# Altium PCB new.PcbDoc
Units mil, origin at the board's own origin, x right, y up, seen from the top; angles counter-clockwise.
Board outline 5529.7 x 2001.01 mil, 2 copper layers (Top Layer, Bottom Layer); 128 components, 106 nets, 434 pads, 0 vias.
Unrouted connection lines stored in the file: 307.
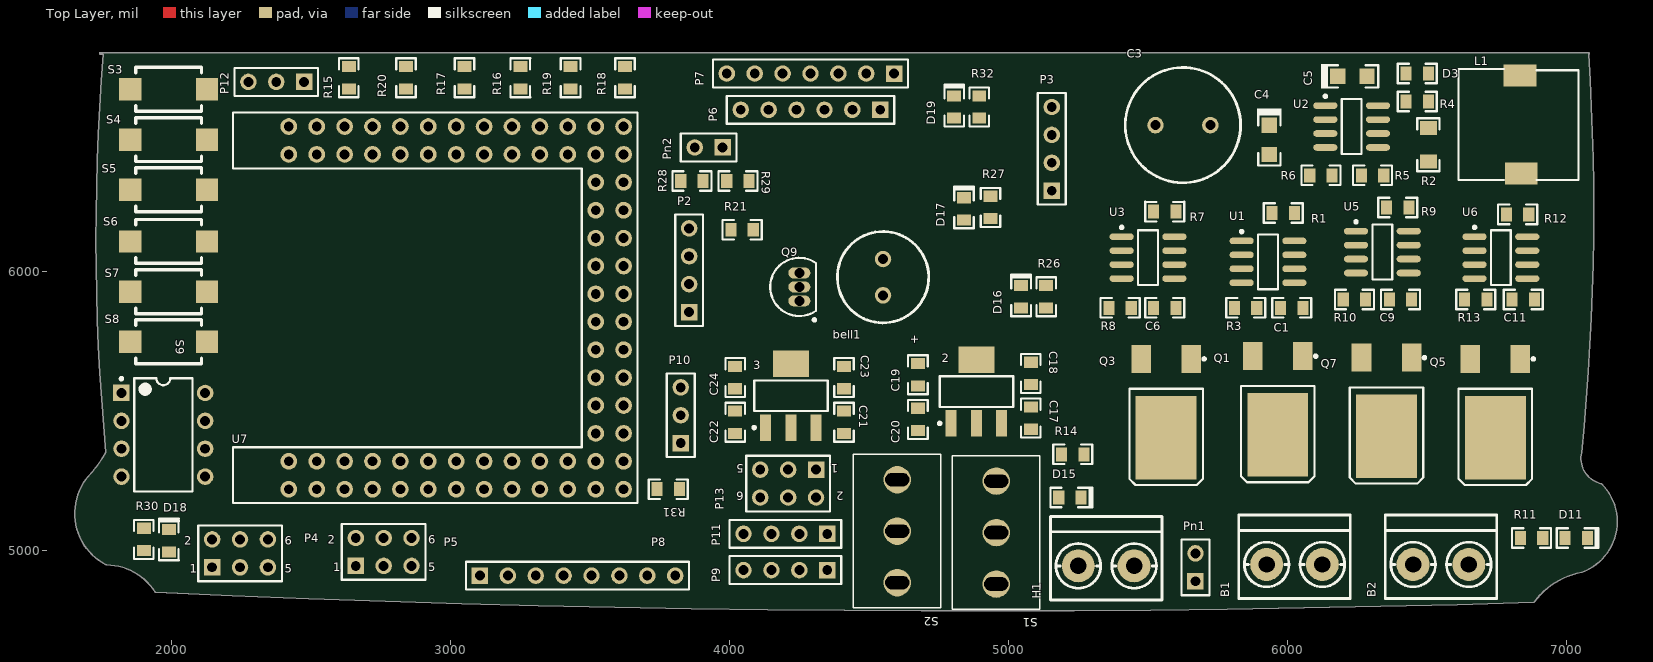
[diagram p0: Top Layer view]
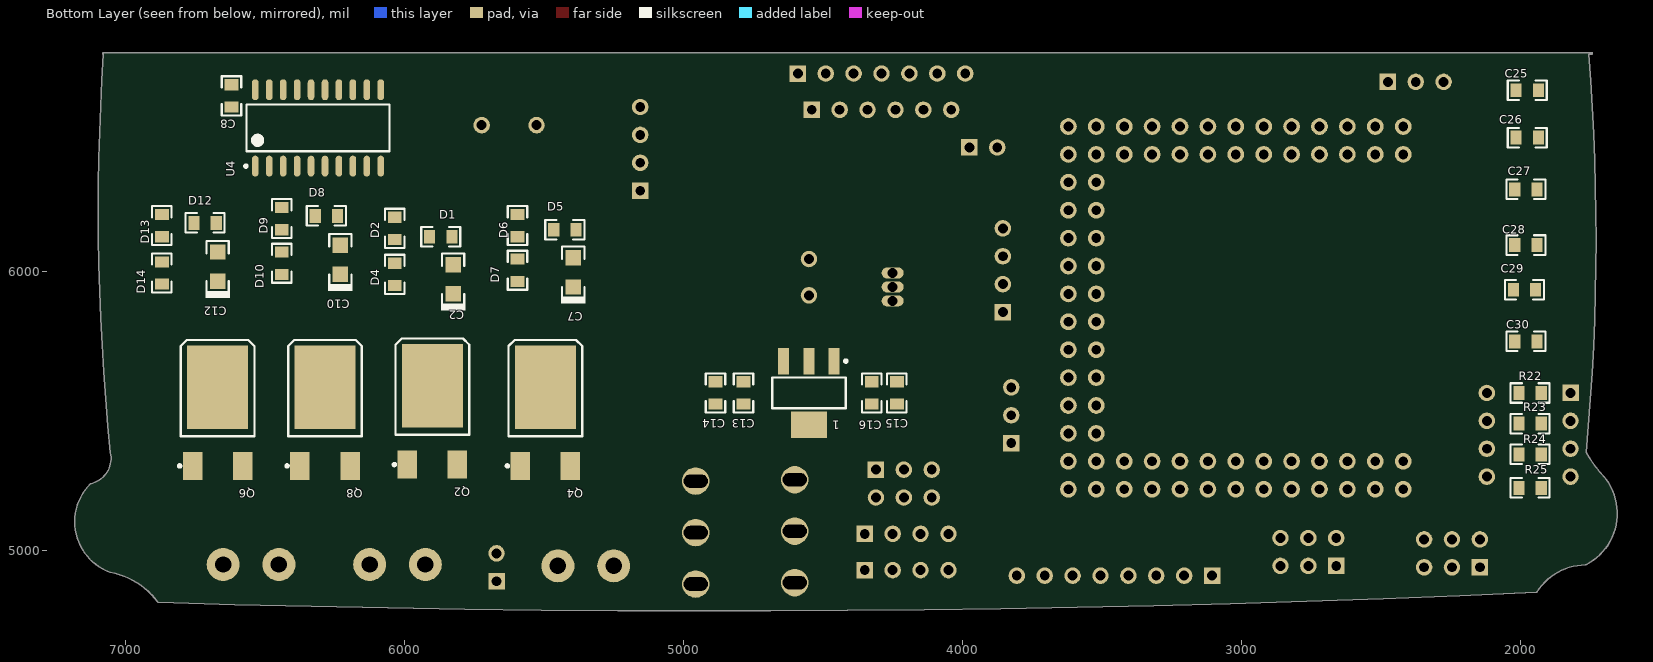
[diagram p1: Bottom Layer view, seen from below]

## Layer stack, top to bottom
Top Layer: signal copper 1.4
Dielectric: dielectric 12.6, FR-4, Dk 4.8
Bottom Layer: signal copper 1.4

## Board outline
1940.05,4851.98 ccw(c1763.61,4739.71) 1766.48,4948.82 ccw(c1763.61,4739.71) 1766.46,4948.82 1766.48,4948.82 cw(c1766.49,4951.34) 1765.36,4949.09 cw(c1857.94,5132.66) 1701.98,5266.61 cw(c1703.89,5264.97) 1702.05,5266.69 ccw(c1354.87,5583.62) 1763.92,5351.97 cw(c10055.25,6117.88) 1754.95,6779.6 1743.9,6779.6 cw(c1743.9,6782.11) 1743.9,6784.63 7079.01,6784.63 cw(c7079.01,6782.11) 7081.52,6782.11 cw(c7079.01,6782.11) 7079.64,6779.68 cw(c-1623.14,6220.55) 7097.58,6220.55 cw(c-1623.14,6220.55) 7054.14,5351.17 cw(c7051.63,5351.42) 7054.08,5350.85 ccw(c7144.82,5330.7) 7124.63,5239.97 ccw(c7144.82,5330.7) 7124.65,5239.97 7124.63,5239.97 cw(c7124.11,5237.51) 7125.89,5239.29 cw(c6989.57,5103.27) 7182.14,5103.27 cw(c6989.57,5103.27) 7055.42,4922.3 cw(c7054.56,4924.67) 7055.01,4922.19 ccw(c7103.51,4655.1) 6884.42,4815.39 ccw(c7103.51,4655.1) 6884.41,4815.37 6884.42,4815.39 cw(c6882.38,4816.86) 6882.46,4814.34 cw(c4888.74,69406.09) 1942.07,4850.8 cw(c1942.19,4853.31)

## Design rules (kind name [scope] priority, off if disabled: settings)
Clearance [All] p1: gap=10
PolygonConnect [All] p1: connectstyle=Relief reliefconductorwidth=10 reliefentries=4 polygonreliefangle="90 Angle" airgapwidth=10
RoutingVias [All] p1: holewidth=28 width=50 viastyle="Through Hole" minholewidth=28 minwidth=50 maxholewidth=28 maxwidth=50
SolderMaskExpansion [All] p1: expansion=4
Width [All] p1: maxlimit=10 minlimit=10 preferedwidth=10
28 further rules are at their usual default settings.

## Classes and differential pairs
component class "mos motor": B1 B2 C1 C2 C3 C4 C5 C6 C7 C8 C9 C10 C11 C12 D1 D2 D3 D4 D5 D6 D7 D8 D9 D10 D11 D12 D13 D14 L1 Q1 Q2 Q3 Q4 Q5 Q6 Q7 Q8 R1 R2 R3 R4 R5 R6 R7 R8 R9 R10 R11 R12 R13 U1 U2 U3 U4 U5 U6
component class 新主控板: 1 2 3 bell1 C13 C14 C15 C16 C17 C18 C19 C20 C21 C22 C23 C24 C25 C26 C27 C28 C29 C30 D15 D16 D17 D18 D19 H1 P2 P3 P4 P5 P6 P7 P8 P9 P10 P11 P12 P13 Pn1 Pn2 Q9 R14 R15 R16 R17 R18 R19 R20 R21 R22 R23 R24 R25 R26 R27 R28 R29 R30 R31 R32 S1 S2 S3 S4 S5 S6 S7 S8 S9 U7

## Components (designator, comment, footprint, x,y, rotation, side; value= is the part's Value field where it differs from the comment)
1 "LT1117-3.3" 1117 4550,5565 r270 bottom
2 "LT1117-5.0" 1117 4885,5570 r90 top
3 "LT1117-5" 1117 4220,5555 r90 top
B1 "Motor" KF301-2P 6025,4950 r90 top
B2 "Motor" KF301-2P 6550,4950 r90 top
bell1 "Bell" 470uF 4550,5875 r90 top
C1 "Cap" 0805(2012) 6015,5870 r0 top
C2 "Cap Pol1" SOD-323(0805) 5825.51,5970 r270 bottom
C3 "Cap Pol1" RB5-10.5 5625,6525 r0 top
C4 "Cap Pol1" SOD-323(0805) 5935,6475 r90 top
C5 "Cap Pol1" SOD-323(0805) 6230,6700 r180 top
C6 "Cap" 0805(2012) 5560,5870 r0 top
C7 "Cap Pol1" SOD-323(0805) 5395,5995 r270 bottom
C8 "Cap" 0805(2012) 6620,6630 r270 bottom
C9 "Cap" 0805(2012) 6405,5900 r180 top
C10 "Cap Pol1" SOD-323(0805) 6230,6040 r270 bottom
C11 "Cap" 0805(2012) 6845,5900 r180 top
C12 "Cap Pol1" SOD-323(0805) 6670,6015 r270 bottom
C13 "Cap Pol1" 0805(2012) 4785,5565 r270 bottom
C14 "Cap Pol1" 0805(2012) 4885,5565 r270 bottom
C15 "Cap" 0805(2012) 4235,5565 r90 bottom
C16 "Cap" 0805(2012) 4325,5565 r90 bottom
C17 "Cap" 0805(2012) 5080,5475 r270 top
C18 "Cap" 0805(2012) 5080,5635 r90 top
C19 "Cap" 0805(2012) 4675,5630 r90 top
C20 "Cap" 0805(2012) 4675,5470 r270 top
C21 "Cap Pol1" 0805(2012) 4410,5460 r90 top
C22 "Cap Pol1" 0805(2012) 4020,5460 r90 top
C23 "Cap" 0805(2012) 4410,5620 r90 top
C24 "Cap" 0805(2012) 4020,5620 r90 top
C25 "Cap" 0805(2012) 1975,6650 r0 bottom
C26 "Cap" 0805(2012) 1975,6480 r0 bottom
C27 "Cap" 0805(2012) 1980,6295 r0 bottom
C28 "Cap" 0805(2012) 1980,6095 r0 bottom
C29 "Cap" 0805(2012) 1985,5935 r0 bottom
C30 "Cap" 0805(2012) 1980,5750 r0 bottom
D1 "1N5819" 0805(2012) 5870,6125 r180 bottom
D2 "1N5819" 0805(2012) 6035,6155 r270 bottom
D3 "1N5819" 0805(2012) 6465,6710 r180 top
D4 "1N5819" 0805(2012) 6035,5990 r270 bottom
D5 "1N5819" 0805(2012) 5425,6150 r180 bottom
D6 "1N5819" 0805(2012) 5595,6165 r270 bottom
D7 "1N5819" 0805(2012) 5595,6005 r270 bottom
D8 "1N5819" 0805(2012) 6280,6200 r180 bottom
D9 "1N5819" 0805(2012) 6440,6190 r270 bottom
D10 "1N5819" 0805(2012) 6440,6030 r270 bottom
D11 "RED" 0805LED 7035,5045 r0 top
D12 "1N5819" 0805(2012) 6715,6175 r180 bottom
D13 "1N5819" 0805(2012) 6870,6165 r270 bottom
D14 "1N5819" 0805(2012) 6870,5995 r270 bottom
D15 "RED" 0805LED 5220,5190 r0 top
D16 "LED0" 0805LED 5045,5910 r90 top
D17 "LED0" 0805LED 4840,6225 r90 top
D18 "LED0" 0805LED 1990,5035 r90 top
D19 "LED0" 0805LED 4805,6590 r90 top
H1 "H1" KF301-2P 5350,4945 r90 top
L1 "Inductor" 电感10*12 6830,6525 r90 top
P2 "blueteeth" HDR1X4 3855,5855 r90 top
P3 "blueteeth" HDR1X4 5155,6290 r90 top
P4 "encode_2" HDR2X3 2145,4940 r0 top
P5 "encode_1" HDR2X3 2660,4945 r0 top
P6 "Header 6" HDR1X6 4540,6580 r180 top
P7 "遥控" HDR1X7 4590,6710 r180 top
P8 "Header 8" HDR1X8 3105,4910 r0 top
P9 "Header 4" HDR1X4 4350,4930 r180 top
P10 "Header 3" HDR1X3 3825,5385 r90 top
P11 "Header 4" HDR1X4 4350,5060 r180 top
P12 "Header 3" HDR1X3 2475,6680 r180 top
P13 "Header 3X2" HDR2X3 4310,5290 r180 top
Pn1 "Header 2" HDR1X2 5670,4890 r90 top
Pn2 "Header 2" HDR1X2 3975,6445 r180 top
Q1 "IR7843" LR7843 5965,5555 r90 top
Q2 "IR7843" LR7843 5900,5450 r270 bottom
Q3 "IR7843" LR7843 5565,5545 r90 top
Q4 "IR7843" LR7843 5495,5445 r270 bottom
Q5 "IR7843" LR7843 6745,5545 r90 top
Q6 "IR7843" LR7843 6670,5445 r270 bottom
Q7 "IR7843" LR7843 6355,5550 r90 top
Q8 "IR7843" LR7843 6285,5445 r270 bottom
Q9 "NPN9013" TO-226-AE 4250,5945 r0 top
R1 "Res2" 0805(2012) 5985,6210 r180 top
R2 "Res2" 1206(3216) 6505,6455 r270 top
R3 "Res2" 0805(2012) 5850,5870 r0 top
R4 "Res2" 0805(2012) 6465,6610 r0 top
R5 "Res2" 0805(2012) 6305,6345 r180 top
R6 "Res2" 0805(2012) 6120,6345 r0 top
R7 "Res2" 0805(2012) 5560,6215 r180 top
R8 "Res2" 0805(2012) 5400,5870 r180 top
R9 "Res2" 0805(2012) 6395,6230 r180 top
R10 "Res2" 0805(2012) 6240,5900 r180 top
R11 "Res2" 0805(2012) 6875,5045 r0 top
R12 "Res2" 0805(2012) 6825,6205 r180 top
R13 "Res2" 0805(2012) 6675,5900 r180 top
R14 "Res2" 0805(2012) 5230,5345 r0 top
R15 "Res2" 0805(2012) 2635,6695 r90 top
R16 "Res2" 0805(2012) 3250,6695 r90 top
R17 "Res2" 0805(2012) 3050,6695 r90 top
R18 "Res2" 0805(2012) 3625,6695 r90 top
R19 "Res2" 0805(2012) 3430,6695 r90 top
R20 "Res2" 0805(2012) 2840,6695 r90 top
R21 "Res2" 0805(2012) 4045,6150 r0 top
R22 "Res2" 0805(2012) 1965,5565 r180 bottom
R23 "Res2" 0805(2012) 1965,5455 r180 bottom
R24 "Res2" 0805(2012) 1965,5345 r180 bottom
R25 "Res2" 0805(2012) 1965,5225 r180 bottom
R26 "Res2" 0805(2012) 5135,5910 r90 top
R27 "Res2" 0805(2012) 4935,6230 r90 top
R28 "Res2" 0805(2012) 3865,6325 r0 top
R29 "Res2" 0805(2012) 4030,6325 r0 top
R30 "Res2" 0805(2012) 1900,5040 r90 top
R31 "Res2" 0805(2012) 3780,5220 r180 top
R32 "Res2" 0805(2012) 4895,6590 r90 top
S1 "SW-SPST" SWICH_3 4955,5065 r180 top
S2 "SW-SPST" SWICH_3 4600,5070 r180 top
S3 "SW-PB" PCBComponent_1 1985,6665 r180 top
S4 "SW-PB" PCBComponent_1 1985,6485 r180 top
S5 "SW-PB" PCBComponent_1 1985,6305 r180 top
S6 "SW-PB" PCBComponent_1 1985,6120 r180 top
S7 "SW-PB" PCBComponent_1 1985,5940 r180 top
S8 "SW-PB" PCBComponent_1 1985,5760 r180 top
S9 "SW-DIP4" DIP-8 1970,5415 r0 top
U1 "IR2104  S" IR2104S 5930,6035 r0 top
U2 "MC34063" MC34063 6230,6520 r0 top
U3 "IR2104  S" IR2104S 5500,6050 r0 top
U4 "74ls244" 74ls244Da 6310,6515 r90 bottom
U5 "IR2104  S" IR2104S 6340,6070 r0 top
U6 "IR2104  S" IR2104S 6765,6050 r0 top
U7 "KEA128" KEA128_BOARD 3020,5870 r90 top

## Footprints (in the part's own frame and the unit in brackets; to place one, negate y for a bottom-side part, rotate by r counter-clockwise, add the part's x,y. Pads: shape width x height; smd on the part's side, far side on the other; paste and mask are expansions set on the pad)
74ls244Da [mm] "SOP, 20-Leads, Body 12.80x5.50mm, Pitch 1.27mm, IPC Medium Density"
  oval 1.9x0.6 smd: 1(-3.475,5.715) 2(-3.475,4.445) 3(-3.475,3.175) 4(-3.475,1.905) 5(-3.475,0.635) 6(-3.475,-0.635) 7(-3.475,-1.905) 8(-3.475,-3.175) 9(-3.475,-4.445) 10(-3.475,-5.715) 11(3.475,-5.715) 12(3.475,-4.445) 13(3.475,-3.175) 14(3.475,-1.905) 15(3.475,-0.635) 16(3.475,0.635) 17(3.475,1.905) 18(3.475,3.175) 19(3.475,4.445) 20(3.475,5.715)
  silkscreen extent -3.6,-6.5 2.13,6.69, body extent -2.8,-6.5 2.8,6.5, height 2.2
470uF [mm]
  round 1.5 hole 0.9: 1(1.016,0) 2(4.318,0)
  silkscreen extent -1.49,-4.16 6.83,4.16
0805(2012) [mil]
  rect 40x50 smd: 1(-40,0) 2(40,0)
  silkscreen extent -70,-35 70,35
0805LED [mil]
  rect 40x50 smd: 1(-40,0) 2(40,0)
  silkscreen extent -70,-35 80,35
1117 [mm] "SOT223, 4-Leads, Body 6.50x7.00mm (avg), Pitch 2.30mm, IPC Medium Density"
  rect 2.4x1 smd: 1(-2.9,2.3) 2(-2.9,0) 3(-2.9,-2.3)
  rect 2.4x3.3 smd: 4(2.9,0)
  silkscreen extent -3.02,-3.35 1.4,3.47, body extent -1.86,-3.35 1.86,3.35, height 1.8
1206(3216) [mil]
  rect 50x60 smd: 1(-60,0) 2(60,0)
  silkscreen extent -95,-40 95,40
DIP-8 [mm] "DIP; 8 Leads; Row Spacing 7.62 mm; Pitch 2.54 mm"
  rect 1.5x1.5 hole 0.9: 1(-3.81,3.81)
  round 1.5 hole 0.9: 2(-3.81,1.27) 3(-3.81,-1.27) 4(-3.81,-3.81) 5(3.81,-3.81) 6(3.81,-1.27) 7(3.81,1.27) 8(3.81,3.81)
  silkscreen extent -3.93,-5.15 2.65,5.23, body extent -3.6,-5.15 3.6,5.15, height 5.08
HDR1X2 [mm] "Connector; Header; 2 Position"
  rect 1.5x1.5 hole 0.9: 1(0,0)
  round 1.5 hole 0.9: 2(2.54,0)
  silkscreen extent -1.27,-1.27 3.81,1.27
HDR1X3 [mm] "Connector; Header; 3 Position"
  rect 1.5x1.5 hole 0.9: 1(0,0)
  round 1.5 hole 0.9: 2(2.54,0) 3(5.08,0)
  silkscreen extent -1.27,-1.27 6.35,1.27
HDR1X4 [mm] "Connector; Header; 4 Position"
  rect 1.5x1.5 hole 0.9: 1(0,0)
  round 1.5 hole 0.9: 2(2.54,0) 3(5.08,0) 4(7.62,0)
  silkscreen extent -1.27,-1.27 8.89,1.27
HDR1X6 [mm] "Connector; Header; 6 Position"
  rect 1.5x1.5 hole 0.9: 1(0,0)
  round 1.5 hole 0.9: 2(2.54,0) 3(5.08,0) 4(7.62,0) 5(10.16,0) 6(12.7,0)
  silkscreen extent -1.27,-1.27 13.97,1.27
HDR1X7 [mm] "Connector; Header; 7 Position"
  rect 1.5x1.5 hole 0.9: 1(0,0)
  round 1.5 hole 0.9: 2(2.54,0) 3(5.08,0) 4(7.62,0) 5(10.16,0) 6(12.7,0) 7(15.24,0)
  silkscreen extent -1.27,-1.27 16.51,1.27
HDR1X8 [mm] "Connector; Header; 8 Position"
  rect 1.5x1.5 hole 0.9: 1(0,0)
  round 1.5 hole 0.9: 2(2.54,0) 3(5.08,0) 4(7.62,0) 5(10.16,0) 6(12.7,0) 7(15.24,0) 8(17.78,0)
  silkscreen extent -1.27,-1.27 19.05,1.27
HDR2X3 [mm] "Connector; Header; 3x2 Position"
  rect 1.5x1.5 hole 0.9: 1(0,0)
  round 1.5 hole 0.9: 2(0,2.54) 3(2.54,0) 4(2.54,2.54) 5(5.08,0) 6(5.08,2.54)
  silkscreen extent -1.27,-1.27 6.35,3.81
IR2104S [mm] "SOIC, 8-Leads, Body 4.90x3.90mm, Pitch 1.27mm, IPC Medium Density"
  oval 2.2x0.6 smd: 1(-2.4,1.905) 2(-2.4,0.635) 3(-2.4,-0.635) 4(-2.4,-1.905) 5(2.4,-1.905) 6(2.4,-0.635) 7(2.4,0.635) 8(2.4,1.905)
  silkscreen extent -2.52,-2.5 0.9,2.88, body extent -2,-2.5 2,2.5, height 1.75
KEA128_BOARD [mil]
  round 60 hole 35: 1(-650,600) 2(-550,600) 3(-650,500) 4(-550,500) 5(-650,400) 6(-550,400) 7(-650,300) 8(-550,300) 9(-650,200) 10(-550,200) 11(-650,100) 12(-550,100) 13(-650,0) 14(-550,0) 15(-650,-100) 16(-550,-100) 17(-650,-200) 18(-550,-200) 19(-650,-300) 20(-550,-300) 21(-650,-400) 22(-550,-400) 23(-650,-500) 24(-550,-500) 25(-650,-600) 26(-550,-600) 27(-450,-500) 28(-450,-600) 29(-350,-500) 30(-350,-600) 31(-250,-500) 32(-250,-600) 33(-150,-500) 34(-150,-600) 35(-50,-500) 36(-50,-600) 37(50,-500) 38(50,-600) 39(150,-500) 40(150,-600) 41(250,-500) 42(250,-600) 43(350,-500) 44(350,-600) 45(450,-500) 46(450,-600) 47(550,-500) 48(550,-600) 49(650,-500) 50(650,-600) 51(550,-400) 52(650,-400) 53(550,-300) 54(650,-300) 55(550,-200) 56(650,-200) 57(550,-100) 58(650,-100) 59(550,0) 60(650,0) 61(550,100) 62(650,100) 63(550,200) 64(650,200) 65(550,300) 66(650,300) 67(550,400) 68(650,400) 69(550,500) 70(650,500) 71(550,600) 72(650,600)
  silkscreen extent -700,-650 700,800
KF301-2P [mm]
  round 3 hole 1.5: 1(0,-2.54) 2(0,2.54)
  silkscreen extent -3.1,-5.08 4.5,5.08
LR7843 [mm]
  rect 2.54x1.778 smd: 1(3.6,-2.28) 3(3.6,2.28)
  rect 7.6x5.55 smd: 2(-3.556,0)
  silkscreen extent -7.87,-3.58 3.72,3.35
MC34063 [mm] "SOIC, 8-Leads, Body 4.90x3.90mm, Pitch 1.27mm, IPC Medium Density"
  oval 2.2x0.6 smd: 1(-2.4,1.905) 2(-2.4,0.635) 3(-2.4,-0.635) 4(-2.4,-1.905) 5(2.4,-1.905) 6(2.4,-0.635) 7(2.4,0.635) 8(2.4,1.905)
  silkscreen extent -2.52,-2.5 0.9,2.88, body extent -2,-2.5 2,2.5, height 1.75
PCBComponent_1 [mil]
  rect 80x80 smd: 1(133.86,11.81) 2(-141.73,11.81)
  silkscreen extent -122,-67 114,91
RB5-10.5 [mm] "Capacitor (Radial); 2 Leads"
  round 1.5 hole 0.9: 1(-2.5,0) 2(2.5,0)
  silkscreen extent -5.25,-5.25 5.25,5.25
SOD-323(0805) [mil]
  rect 55x55 smd: 1(-55,0) 2(50,0)
  silkscreen extent -95,-44 110,44
SWICH_3 [mm]
  round 2.5 hole 1.2 slot 2.2 at 0 deg: 1(-0.025,-4.674) 2(-0.025,0.013) 3(-0.025,4.699)
  silkscreen extent -4,-7 4,7
TO-226-AE [mm] "TO, Flat Index; 3 In-Line, Axial Leads; Body Dia. 4.8mm; Leads 0.55 x 0.51 mm (max)"
  oval 2x1 hole 0.9: 1(0,-1.27) 2(0,0) 3(0,1.27)
  silkscreen extent -2.65,-3.13 1.52,2.65, body extent -2.66,-2.66 1.52,2.66, height 7.87
电感10*12 [mm]
  rect 2x3 smd: 1(-4.4,-0.2) 2(4.5,-0.1)
  silkscreen extent -5,-5.4 5.1,5.5

## Part data
2 3: library part LT1117-3.3
B1 B2: library part "Motor Servo", "Servo Motor"
bell1: "Electrical Bell"
C1 C6 C8 C9 C11 C15 C16 C17 C18 C19 C20 C23 C24 C25 C26 C27 C28 C29 C30: "Capacitor"
C2 C3 C4 C5 C7 C10 C12 C13 C14 C21 C22: "Polarized Capacitor (Radial)"
D1 D2 D3 D4 D5 D6 D7 D8 D9 D10 D12 D13 D14: library part 1N4148, "Silicon Epitaxial Planar Diode for Various Detector, Modulator, Demodulator"
D11 D15: library part LED2, "Typical RED, GREEN, YELLOW, AMBER GaAs LED"
D16 D17 D18 D19: "Typical INFRARED GaAs LED"
P4 P5: library part encode
P6: "Header, 6-Pin"
P7: library part MHDR1X7, "Header, 7-Pin"
P8: "Header, 8-Pin"
P9 P11: "Header, 4-Pin"
P10 P12: "Header, 3-Pin"
P13: "Header, 3-Pin, Dual row"
Pn1 Pn2: "Header, 2-Pin"
Q1 Q2 Q3 Q4 Q5 Q6 Q7 Q8: "N-Channel Power MOSFET"
Q9: library part 2N3904, "NPN General Purpose Amplifier"
R1 R2 R3 R4 R5 R6 R7 R8 R9 R10 R11 R12 R13 R14 R15 R16 R17 R18 R19 R20 R21 R22 R23 R24 R25 R26 R27 R28 R29 R30 R31 R32: "Resistor"
S1 S2: "Single-Pole, Single-Throw Switch"
S3 S4 S5 S6 S7 S8: "Switch"
S9: "DIP Switch"
U2: library part Component_1

## Nets (pads, with @x,y where several pads share a name; then routed paths per layer and width w, separated by ;. In a path a pad name is that pad's centre, name@x,y a point inside that pad or via, vN(x,y) a via of type N, cw(c..) or ccw(c..) an arc to the next point about the centre after c; other vN are vias at no path point)
3V3: 1.2 bell1.1 C14.1 C16.2 P6.2 P7.2 P10.1 P13.1 P13.2 R15.2 R16.2 R17.2 R18.2 R19.2 R20.2 R22.2 R23.2 R24.2 R25.2 R26.2 R27.2 R30.2 R31.1 R32.2
5V: 2.2 C8.2 C19.2 C20.2 P2.1 P3.1 P4.2 P5.2 P8.8 P9.1 P11.1 P13.3 P13.4 U4.20
5VIC: 3.2 C22.1 C24.2 R28.1 U7.2
12V: C2.1 C3.1 C7.1 C10.1 C12.1 D1.2 D3.1 D5.2 D8.2 D12.2 R5.1 U1.1 U1.3 U3.1 U3.3 U5.1 U5.3 U6.1 U6.3
GND: 1.1 2.1 3.1 C2.2 C3.2 C4.2 C5.2 C7.2 C8.1 C10.2 C12.2 C13.2 C14.2 C15.1 C16.1 C17.1 C18.1 C19.1 C20.1 C21.2 C22.2 C23.1 C24.1 C25.1 C26.1 C27.1 C28.1 C29.1 C30.1 D4.2 D7.2 D10.2 D11.2 D14.2 D15.2 H1.1 P2.2 P3.2 P4.1 P5.1 P6.1 P7.1 P8.7 P9.2 P10.2 P11.2 P12.3 P13.5 P13.6 Pn1.2 Q2.3 Q4.3 Q6.3 Q8.3 Q9.1 R6.1 R29.2 S3.1 S4.1 S5.1 S6.1 S7.1 S8.1 S9.1 S9.2 S9.3 S9.4 U1.4 U2.2 U2.4 U3.4 U4.1 U4.3 U4.5 U4.7 U4.9 U4.10 U4.11 U4.13 U4.15 U4.17 U4.19 U5.4 U6.4 U7.1 U7.72
"MOTOR1 IN1": U4.18 U5.2
"MOTOR1 IN2": U4.16 U6.2
"MOTOR1 IN3": U3.2 U4.14
"MOTOR1 IN4": U1.2 U4.12
NetB1_1: B1.1 C1.2 D2.2 D4.1 Q1.3 Q2.2 U1.6
NetB1_2: B1.2 C6.2 D6.2 D7.1 Q3.3 Q4.2 U3.6
NetB2_1: B2.1 C9.2 D9.2 D10.1 Q5.3 Q6.2 U5.6
NetB2_2: B2.2 C11.2 D13.2 D14.1 Q7.3 Q8.2 U6.6
Netbell1_2: bell1.2 Q9.3
NetC1_1: C1.1 D1.1 U1.8
NetC4_1: C4.1 U2.3
NetC6_1: C6.1 D5.1 U3.8
NetC9_1: C9.1 D8.1 U5.8
NetC11_1: C11.1 D12.1 U6.8
NetD3_2: D3.2 L1.2 U2.1
NetD11_1: D11.1 R11.2
NetD15_1: D15.1 R14.1
NetD16_1: D16.1 R26.1
NetD17_1: D17.1 R27.1
NetD18_1: D18.1 R30.1
NetD19_1: D19.1 R32.1
NetH1_2: H1.2 S1.1
NetL1_1: L1.1 R2.1 R4.2 U2.7
NetQ1_1: Q1.1 R1.2
NetQ2_1: Q2.1 R3.2
NetQ3_1: Q3.1 R7.2
NetQ4_1: Q4.1 R8.2
NetQ5_1: Q5.1 R9.2
NetQ6_1: Q6.1 R10.2
NetQ7_1: Q7.1 R12.2
NetQ8_1: Q8.1 R13.2
NetQ9_2: Q9.2 R21.2
NetR1_1: R1.1 U1.7
NetR3_1: R3.1 U1.5
NetR4_1: R4.1 U2.8
NetR5_2: R5.2 R6.2 U2.5
NetR7_1: R7.1 U3.7
NetR8_1: R8.1 U3.5
NetR9_1: R9.1 U5.7
NetR10_1: R10.1 U5.5
NetR12_1: R12.1 U6.7
NetR13_1: R13.1 U6.5
PTA0: C25.2 R15.1 S3.2 U7.57
PTA1: C26.2 R16.1 S4.2 U7.56
PTA2: C27.2 R17.1 S5.2 U7.55
PTA3: C28.2 R18.1 S6.2 U7.54
PTA6: Pn2.1 R28.2 R29.1 U7.43
PTA7: Pn2.2 U7.42
PTB0: P2.3 U7.39
PTB1: P2.4 U7.38
PTB2: P11.3 U7.37
PTB3: P11.4 U7.36
PTB5: U7.19
PTB6: U7.20
PTC0: P8.3 U7.29
PTC1: P8.4 U7.28
PTC2: P8.5 U7.22
PTC3: P8.6 U7.21
PTC5: P4.4 U7.70
PTC6: R21.1 U7.59
PTC7: C30.2 R20.1 S8.2 U7.58
PTD0: D18.2 U7.4
PTD1: D19.2 U7.3
PTD2: C29.2 R19.1 S7.2 U7.53
PTD3: R23.1 S9.7 U7.52
PTD4: R22.1 S9.8 U7.51
PTD5: P10.3 R31.2 U7.25
PTD6: U7.24
PTD7: U7.23
PTE0: P4.3 U7.69
PTE1: U7.68
PTE2: P7.5 U7.63
PTE3: P7.6 U7.62
PTE4: P7.7 U7.44
PTE5: P6.5 U7.18
PTE6: P6.6 U7.17
PTE7: P5.3 U7.8
PTF0: R25.1 S9.5 U7.49
PTF1: R24.1 S9.6 U7.47
PTF2: P7.3 U7.41
PTF3: P7.4 U7.40
PTF4: P12.1 U7.35
PTF5: P12.2 U7.34
PTF6: P8.1 U7.33
PTF7: P8.2 U7.32
PTG4: U4.2 U7.50
PTG5: U4.4 U7.48
PTG6: U4.6 U7.46
PTG7: U4.8 U7.45
PTH0: P6.3 U7.16
PTH1: P6.4 U7.15
PTH2: U7.9
PTH3: P9.4 U7.31
PTH4: P9.3 U7.30
PTH5: P5.4 U7.7
PTH6: D16.2 U7.6
PTH7: D17.2 U7.5
PTI0: P3.3 U7.14
PTI1: P3.4 U7.13
VBAT: C5.1 D2.1 D6.1 D9.1 D13.1 Q1.2 Q3.2 Q5.2 Q7.2 R2.2 R11.1 S2.1 U2.6
VCC: 1.3 2.3 3.3 C13.1 C15.2 C17.2 C18.2 C21.1 C23.2 Pn1.1 R14.2 S1.2 S2.2
pads on no net: 1.4 2.4 3.4 P4.5 P4.6 P5.5 P5.6 S1.3 S2.3 U7.10 U7.11 U7.12 U7.26 U7.27 U7.60 U7.61 U7.64 U7.65 U7.66 U7.67 U7.71

## Silkscreen, mask and mechanical layers (free items; w line width, h text height)
Mechanical 1:
  lines w5: 1743.9,6782.11 7079.01,6782.11 ; 1757.68,6782.11 ccw(c10055.25,6117.88) 1766.49,5351.42 cw(c1354.87,5583.62) 1703.89,5264.97 ccw(c1857.94,5132.66) 1766.49,4951.34 cw(c1763.61,4739.71) 1942.19,4853.31 ccw(c4888.74,69406.09) 6882.38,4816.86 cw(c7103.51,4655.1) 7054.56,4924.67 ccw(c6989.57,5103.27) 7124.11,5237.51 cw(c7144.82,5330.7) 7051.63,5351.42 ccw(c-1623.14,6220.55) 7076.96,6782.11

## Text inside footprints (layer, text, board x,y; h text height)
bell1: Top Overlay "+" at 4676,5740 h30 r90
P4: Top Overlay "6" at 2405,5020 h30; Top Overlay "5" at 2405,4920 h30; Top Overlay "2" at 2045,5020 h30; Top Overlay "1" at 2065,4920 h30
P5: Top Overlay "6" at 2920,5025 h30; Top Overlay "5" at 2920,4925 h30; Top Overlay "2" at 2560,5025 h30; Top Overlay "1" at 2580,4925 h30
P13: Top Overlay "6" at 4050,5210 h30 r180; Top Overlay "5" at 4050,5310 h30 r180; Top Overlay "2" at 4410,5210 h30 r180; Top Overlay "1" at 4390,5310 h30 r180